# Altium PCB Main_conection.PcbDoc (part 3 of 3)
Units mm, origin at the board's own origin, x right, y up, seen from the top; angles counter-clockwise.
Board outline 75.25 x 97.25 mm, 4 copper layers (Top Layer, Layer 1, Layer 2, Bottom Layer), stack 1.57 mm thick; 186 components, 91 nets, 471 pads, 242 vias.
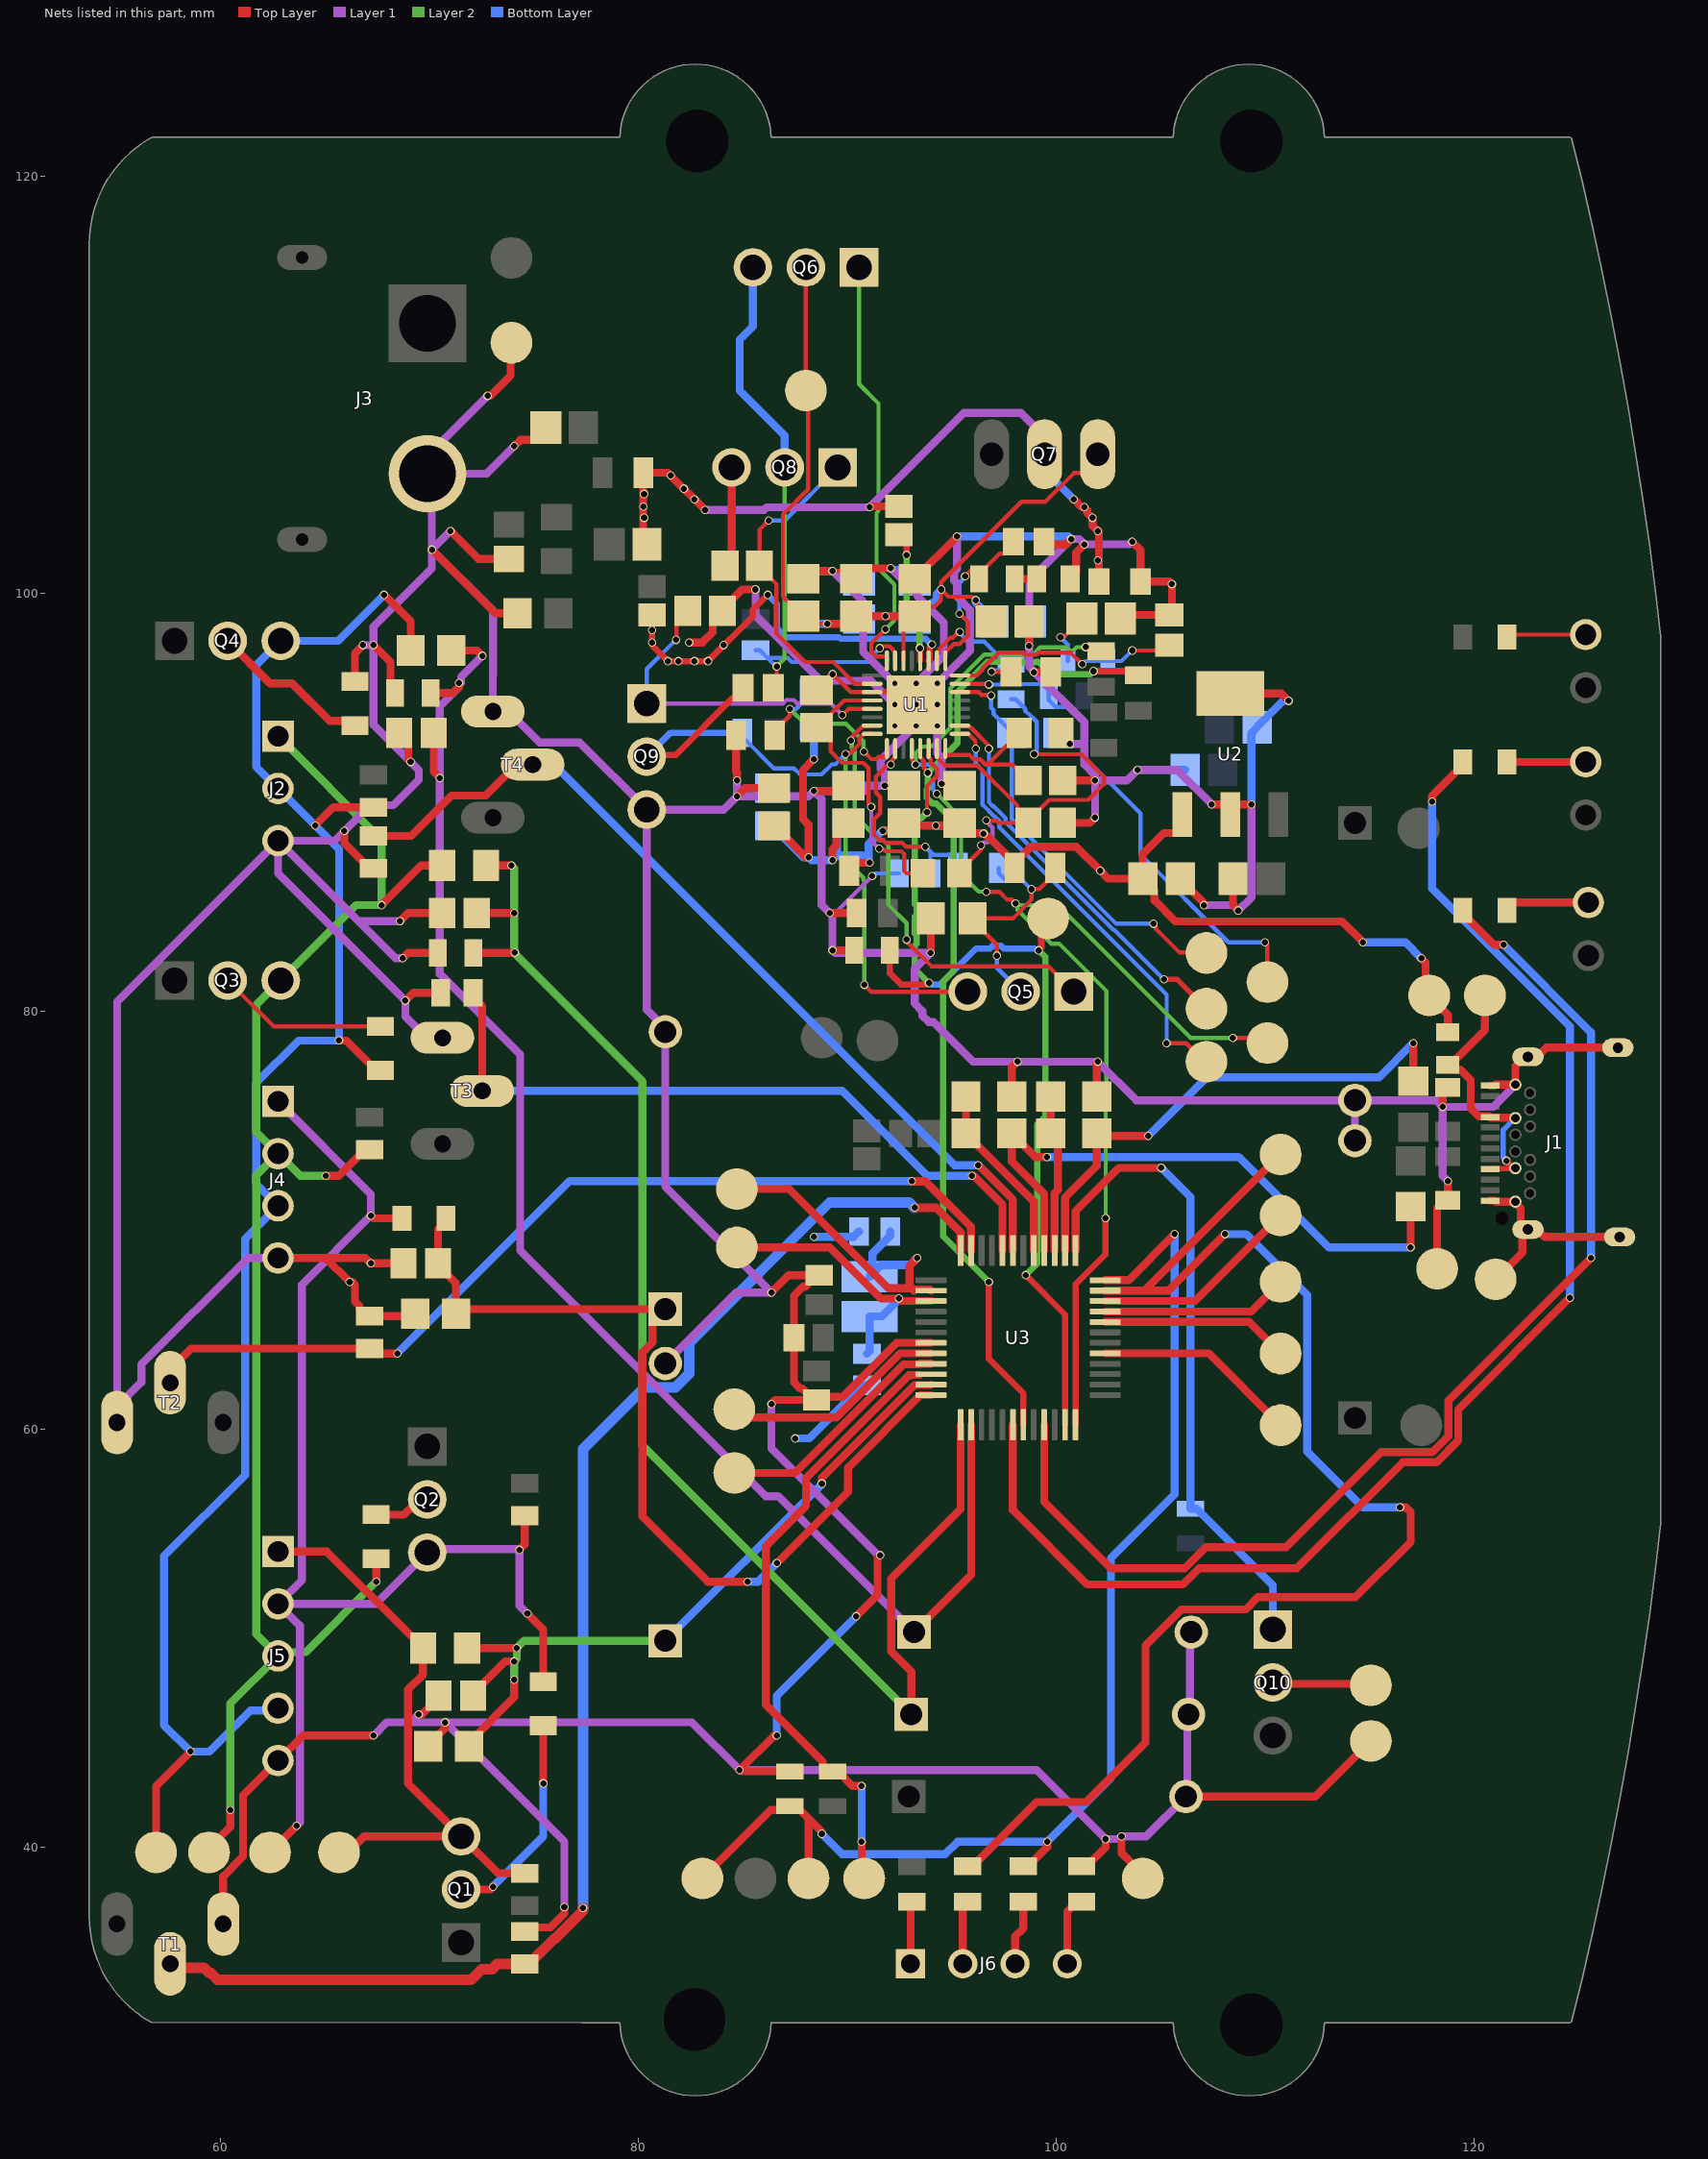
[diagram p4: the nets of this part, all layers, seen from the top]

## Via types
v1: diameter 0.4, hole 0.3, Top Layer to Bottom Layer, 242 vias

## Nets (pads, with @x,y where several pads share a name; then routed paths per layer and width w, separated by ;. In a path a pad name is that pad's centre, name@x,y a point inside that pad or via, vN(x,y) a via of type N, cw(c..) or ccw(c..) an arc to the next point about the centre after c; other vN are vias at no path point) (continued)
CELL_1S: J2.2 J4.3 J5.4 Q4.3 R13.1 R14.2 R39.2 Tp12.1 | length 86.6
  Top Layer w0.381: Tp12.1@56.896,39.751 56.896,42.926 v1(58.547,44.577) ; v1(64.516,88.9) 65.391,89.775 R14.2@67.31,89.775 ; v1(65.659,78.613) 66.004,78.613 67.435,77.182 R13.1@67.635,77.182 ; v1(67.818,99.949) 69.088,98.679 R39.2@69.088,97.282
  Bottom Layer w0.381: J5.4@62.738,46.649 62.624,46.535 61.412,46.535 59.454,44.577 v1(58.547,44.577) 57.277,45.847 57.277,53.93 61.166,57.818 61.166,69.127 J4.3@62.738,70.699 61.692,71.745 61.692,76.574 63.731,78.613 v1(65.659,78.613) 65.659,87.757 v1(64.516,88.9) J2.2@62.738,90.678 61.692,91.724 61.692,96.569 Q4.3@62.865,97.742 65.611,97.742 v1(67.818,99.949)
CELL_1S_ADC: C43.2 D3.1 R39.1 R45.2 U3.14 | length 73.9
  Top Layer w0.381: R45.2@70.037,95.25 71.12,95.25 71.407,95.537 v1(71.407,95.725) ; C43.2@70.187,93.345 70.187,91.484 v1(70.485,91.186) ; R39.1@71.04,97.282 72.263,97.282 v1(72.517,97.028) ; D3.1@93.184,50.292 95.921,53.029 U3.14@95.921,60.219
  Layer 1 w0.381: v1(71.407,95.725) 71.407,95.537 70.485,94.615 v1(70.485,91.186) 70.485,81.795 74.333,77.947 74.333,68.555 86.087,56.801 86.675,56.801 D3.1@93.184,50.292 ; v1@71.501,95.725 71.501,96.012 v1(72.517,97.028)
CELL_1S_DIS_EN: R16.2 T4.2 U3.43 | length 43.1
  Top Layer w0.381: R16.2@67.31,88.406 69.109,88.406 71.038,90.335 72.682,90.335 74.168,91.821 T4.2@74.93,91.821 ; v1(96.266,72.644) 97.921,70.989 U3.43@97.921,68.559
  Bottom Layer w0.381: T4.2@74.93,91.821 75.946,91.821 95.123,72.644 v1(96.266,72.644)
CELL_2S: J2.1 J4.2 J5.3 Q3.3 R10.1 R11.2 R37.2 Tp11.1 | length 77.7
  Top Layer w0.381: Tp11.1@59.436,39.751 59.436,39.941 60.452,40.957 v1(60.452,41.783) ; v1(65.024,72.136) 65.654,72.136 66.91,73.392 R11.2@67.112,73.392 ; v1(67.437,52.705) R10.1@67.437,53.814 ; v1(67.691,85.09) 69.596,86.995 R37.2@70.597,86.995
  Layer 2 w0.381: v1(60.452,41.783) 60.452,46.863 J5.3@62.738,49.149 ; J2.1@62.738,93.178 67.691,88.225 v1(67.691,85.09) 66.469,85.09 Q3.3@62.865,81.486 61.692,80.313 61.692,74.245 J4.2@62.738,73.199 ; v1(65.024,72.136) 63.801,72.136 J4.2@62.738,73.199 ; v1(67.437,52.705) 64.064,49.332 62.921,49.332 J5.3@62.738,49.149 ; J5.3@62.738,49.149 61.692,50.195 61.692,72.153 J4.2@62.738,73.199
CELL_2S_ADC: C40.2 D4.1 R37.1 R41.2 U3.13 | length 69.2
  Top Layer w0.381: R41.2@72.097,82.804 74.06,82.804 v1(74.074,82.818) ; C40.2@72.247,84.709 v1(74.041,84.709) ; R37.1@72.697,86.995 v1(73.914,86.995) ; D4.1@93.057,46.355 93.057,48.406 92.092,49.371 92.092,52.853 95.421,56.182 U3.13@95.421,60.219
  Layer 2 w0.381: v1(73.914,86.995) 74.041,86.868 v1(74.041,84.709) 74.041,82.851 v1(74.074,82.818) ; v1@74.051,82.794 80.188,76.657 80.188,59.224 D4.1@93.057,46.355
CELL_2S_DIS_EN: R12.2 T3.2 U3.44 | length 34.2
  Top Layer w0.381: R12.2@72.076,80.899 72.076,80.697 72.517,80.256 T3.2@72.517,76.2 ; v1(95.965,72.128) 96.052,72.128 97.421,70.76 U3.44@97.421,68.559
  Bottom Layer w0.381: T3.2@72.517,76.2 89.756,76.2 93.828,72.128 v1(95.965,72.128)
CELL_3S: J4.1 J5.2 Q2.3 R6.1 R8.2 R38.2 Tp10.1 | length 63.4
  Top Layer w0.381: Tp10.1@62.357,39.751 v1(63.627,41.021) ; v1(67.183,70.231) 67.31,70.104 R38.2@68.673,70.104 ; v1(74.295,54.229) 74.549,54.483 R8.2@74.549,55.866 ; v1(74.676,51.181) 75.438,50.419 R6.1@75.438,47.913
  Layer 1 w0.381: J4.1@62.738,75.699 67.183,71.254 v1(67.183,70.231) 63.881,66.929 63.881,52.792 J5.2@62.738,51.649 ; v1(63.627,41.021) 63.784,41.178 63.784,50.603 J5.2@62.738,51.649 ; v1(74.676,51.181) 74.295,51.562 v1(74.295,54.229) 74.264,54.26 70.039,54.26 67.428,51.649 J5.2@62.738,51.649
CELL_3S_ADC: C42.2 D5.1 R38.1 R44.2 U3.12 | length 45
  Top Layer w0.381: C42.2@70.4,67.845 71.252,66.993 R44.2@71.252,65.532 71.472,65.752 D5.1@81.28,65.752 80.67,65.142 80.67,64.163 80.188,63.68 80.188,55.829 83.312,52.705 v1(85.217,52.705) ; C42.2@70.4,67.945 70.4,69.581 70.773,69.954 R38.1@70.773,70.104 ; v1(86.614,53.594) 90.03,57.01 90.03,58.172 93.497,61.639 U3.12@94.001,61.639
  Bottom Layer w0.381: v1(85.217,52.705) 85.725,52.705 v1(86.614,53.594)
CELL_3S_DIS_EN: R9.2 T2.2 U3.47 | length 45
  Top Layer w0.381: T2.2@57.572,62.23 57.572,62.856 58.582,63.867 R9.2@67.112,63.867 67.352,63.627 v1(68.453,63.627)
  Top Layer w0.4: v1(93.091,71.882) 93.101,71.872 93.736,71.872 95.921,69.687 U3.47@95.921,68.559
  Bottom Layer w0.381: v1(68.453,63.627) 76.708,71.882 v1(93.091,71.882)
CELL_4S: J5.1 Q1.3 R1.2 R36.2 Tp9.1 | length 29.2
  Top Layer w0.381: J5.1@62.738,54.149 65.07,54.149 69.129,50.09 69.254,50.09 69.689,49.655 69.676,49.642 69.676,48.261 68.961,47.546 68.961,43.053 Q1.3@71.501,40.513 ; Tp9.1@65.659,39.751 66.097,39.751 66.859,40.513 Q1.3@71.501,40.513 ; R1.2@74.549,38.749 73.265,38.749 Q1.3@71.501,40.513
CELL_4S_ADC: C39.2 D6.1 R36.1 R42.2 U3.11 | length 36
  Top Layer w0.381: R36.1@71.789,49.53 v1(74.168,49.53) ; R42.2@71.882,44.831 71.882,45.011 74.041,47.17 v1(74.041,48.006) ; C39.2@72.072,47.244 72.072,47.344 73.623,48.895 v1(74.041,48.895) ; v1(88.773,57.404) 88.773,57.689 93.206,62.122 93.984,62.122 U3.11@94.001,62.139
  Layer 2 w0.381: v1(74.041,48.006) v1(74.041,48.895) 74.168,49.022 v1(74.168,49.53) 74.515,49.877 D6.1@81.28,49.877
  Bottom Layer w0.381: D6.1@81.28,49.877 88.773,57.37 v1(88.773,57.404)
CELL_4S_DIS_EN: R3.2 T1.2 U3.48 | length 68.8
  Top Layer w0.4: v1(93.218,70.612) 93.227,70.603 94.243,70.603 95.421,69.425 U3.48@95.421,68.559
  Top Layer w0.5: T1.2@57.572,34.417 57.77,34.218 59.2,34.218 59.452,33.967 59.531,33.967 59.843,33.655 71.981,33.655 72.487,34.161 72.991,34.161 73.234,34.403 74.751,34.403 75.95,35.602 75.991,35.602 77.343,36.955 v1(77.343,37.084)
  Bottom Layer w0.5: v1(77.343,37.084) 77.343,59.055 80.291,62.003 81.756,62.003 82.43,62.677 82.43,64.142 89.154,70.866 92.964,70.866 v1(93.218,70.612)
CELL_BATPRESZ: R25.1 R26.2 U1.18 | length 7.1
  Top Layer w0.2: U1.18@94.286,96.788 94.286,97.188 94.386,97.288 94.386,97.349 94.934,97.897 95.049,97.897 95.323,98.171 v1(95.377,98.171) ; v1(96.901,96.266) R26.2@97.831,96.266
  Bottom Layer w0.2: v1(95.377,98.171) 95.377,98.117 95.616,97.878 95.616,97.844 95.757,97.702 96.551,97.702 97.606,96.647 R25.1@97.831,96.647 97.506,96.322 96.971,96.322 96.915,96.266 v1(96.901,96.266)
CHRG_OK: R35.1 Tp18.1 U1.4 U3.24 | length 66
  Top Layer w0.2: U1.4@93.086,92.588 93.086,92.046 93.262,91.87 v1(93.262,91.816) ; v1(96.647,85.725) 97.282,85.725 97.656,85.351 97.864,85.351 v1(98.043,85.171) ; v1(101.403,97.446) 101.946,97.446 R35.1@102.149,97.243 ; v1(108.458,78.74) 108.468,78.73 109.865,78.73 Tp18.1@110.109,78.486
  Top Layer w0.3: U3.24@100.921,60.219 100.921,66.939 102.362,68.38 v1(102.362,70.104)
  Layer 2 w0.2: v1(93.262,91.816) 93.262,92.354 93.589,92.681 94.028,92.681 94.927,93.581 94.927,95.461 96.559,97.093 98.494,97.093 98.514,97.073 98.866,97.073 99.225,97.432 100.48,97.432 100.629,97.282 100.814,97.282 100.978,97.446 v1(101.403,97.446) ; v1(94.277,90.424) 95.442,89.259 95.442,86.58 96.287,85.735 96.637,85.735 v1(96.647,85.725) ; v1(98.043,85.171) 98.057,85.171 v1@98.138,85.09 ; v1(102.362,70.104) 102.362,75.524 102.406,75.568 102.406,80.975 100.133,83.249 99.758,83.249 98.142,84.865 98.142,85.086 v1@98.138,85.09 ; v1(108.458,78.74) 106.426,78.74 100.076,85.09 v1@98.138,85.09
  Bottom Layer w0.2: v1(93.262,91.816) 93.267,91.821 94.073,91.821 94.278,91.616 94.278,91.264 94.093,91.078 94.093,90.622 94.277,90.438 v1(94.277,90.424)
CMPIN: R31.2 Tp15.1 U1.14 | length 19.9
  Top Layer w0.2: U1.14@95.386,95.288 96.281,95.288 96.408,95.161 96.843,95.161 v1(96.881,95.123) ; v1(104.648,84.201) 104.648,84.187 104.775,84.06 104.775,83.947 105.888,82.834 107.158,82.834 Tp15.1@107.188,82.804
  Bottom Layer w0.2: v1(96.881,95.123) 96.881,94.537 96.99,94.427 96.99,94.249 97.874,93.365 R31.2@97.874,93.345 97.874,89.197 102.87,84.201 v1(104.648,84.201)
COMP1: C28.2 R28.2 U1.16 | length 11.2
  Top Layer w0.2: U1.16@95.386,96.088 96.186,96.088 96.476,96.378 96.476,96.442 96.725,96.691 96.764,96.691 97.244,97.172 98.418,97.172 98.516,97.073 99.047,97.073 99.146,97.172 100.69,97.172 v1(101.239,96.623) ; v1(103.632,97.282) 105.156,97.282 C28.2@105.41,97.536
  Bottom Layer w0.2: v1(101.239,96.623) 101.253,96.623 101.404,96.774 R28.2@102.464,96.774 103.124,96.774 v1(103.632,97.282)
COMP2: C27.2 R30.2 U1.17 | length 8.1
  Top Layer w0.2: U1.17@94.686,96.788 94.686,97.188 95.095,97.597 95.368,97.597 95.777,98.005 95.777,98.634 v1(95.364,99.047) ; v1(95.631,100.838) R30.2@96.017,101.224 ; R30.2@96.305,100.711 96.305,100.936 97.283,101.914 97.479,101.914 97.954,102.389 C27.2@97.954,102.489
  Bottom Layer w0.2: v1(95.364,99.047) 95.364,100.517 95.631,100.784 v1(95.631,100.838)
EN_OTG: R34.1 U1.5 U3.19 | length 49.1
  Top Layer w0.2: U1.5@93.486,92.588 93.486,92.188 93.586,92.088 93.586,92.054 93.662,91.977 93.662,91.666 93.853,91.475 v1(93.853,91.421)
  Top Layer w0.3: v1(96.774,67.056) 96.774,63.373 98.421,61.726 U3.19@98.421,60.219 ; v1(101.789,96.293) 103.734,96.293 R34.1@103.927,96.1
  Layer 2 w0.3: v1(93.853,91.421) 93.853,90.672 93.802,90.621 93.802,90.227 94.08,89.949 94.255,89.949 95.09,89.114 95.09,81.946 94.581,81.437 94.581,69.249 v1(96.774,67.056) ; v1@93.862,91.431 93.862,91.449 95.279,92.866 95.279,95.315 96.704,96.741 98.349,96.741 98.368,96.721 99.012,96.721 99.031,96.741 99.13,96.741 99.723,96.148 101.644,96.148 v1(101.789,96.293)
F\A\N\_\E\N\: Q10.1 R53.1 U3.37 | length 31.3
  Top Layer w0.381: U3.37@100.921,68.559 100.921,70.441 102.997,72.517 v1(105.029,72.517)
  Bottom Layer w0.381: v1(105.029,72.517) 106.426,71.12 R53.1@106.426,56.199 106.701,56.199 110.363,52.536 Q10.1@110.363,50.419
GND: C1.1 C2.2 C5.1 C6.1 C9.2 C10.2 C11.2 C12.1 C13.1 C14.1 C15.1 C16.1 C17.1 C18.1 C19.1 C20.1 C21.1 C22.1 C23.1 C24.1 C25.1 C26.1 C27.1 C28.1 C29.1 C30.1 C31.1 C32.1 C33.1 C34.1 C35.1 C36.1 C37.1 C38.1 C39.1 C40.1 C41.1 C42.1 C43.1 C44.1 C45.1 C46.1 C47.2 C48.2 D1.2 D2.2 D3.2 D4.2 D5.2 D6.2 D7.2 J1.A1 J1.A12 J1.B1 J1.B12 J1.SH1 J1.SH2 J1.SH3 J1.SH4 J2.3 J3.2 J4.4 J5.5 Q9.3 R3.1 R5.1 R7.1 R9.1 R12.1 R15.1 R16.1 R26.1 R27.1 R29.1 R31.1 R41.1 R42.1 R43.1 R44.1 R45.1 R48.1 R50.1 R51.1 R61.1 T1.1 T2.1 T3.1 T4.1 Tp5.1 Tp6.1 Tp8.1 Tp20.1 Tp35.1 U1.27 U1.GND U1.GND1 U1.P$1 U1.P$2 U1.P$3 U1.P$4 U1.P$5 U1.P$6 U1.P$7 U1.P$8 U1.P$9 U2.2 U2.4 U3.7 | length 584.1
  Top Layer w0.2: v1(89.281,101.092) 90.054,101.092 C33.1@90.424,100.722 ; v1(89.295,96.154) 90.161,95.288 U1.27@91.186,95.288 91.831,95.288 92.247,95.704 U1.P$3@92.27,95.704 ; v1(94.518,90.902) 95.291,90.902 C26.1@95.377,90.816
  Top Layer w0.381: T1.1@60.112,36.322 60.112,38.599 61.065,39.553 61.065,42.476 J5.5@62.738,44.149 63.928,45.339 v1(67.31,45.339) ; J4.4@62.738,68.199 65.024,68.199 ; v1(65.913,88.646) 65.913,88.049 67.108,86.854 R16.1@67.31,86.854 ; R15.1@66.421,95.792 66.421,97.155 v1(66.802,97.536) ; v1(67.31,97.536) 68.119,96.727 68.119,95.469 R45.1@68.337,95.25 ; C43.1@68.537,93.345 68.972,92.91 68.972,92.064 v1(69.088,91.948) ; v1(68.58,84.328) 68.961,84.709 C40.1@70.597,84.709 ; v1(68.707,82.55) 68.961,82.804 R41.1@70.397,82.804 ; C42.1@68.75,67.945 v1(67.183,67.945) 66.929,68.199 65.024,68.199 ; v1(68.834,80.518) 69.215,80.899 R12.1@70.523,80.899 ; R44.1@69.3,65.532 69.187,65.419 R9.1@67.112,65.419 66.91,65.419 66.648,65.682 66.648,65.883 66.421,66.11 66.421,66.929 66.294,67.056 v1(66.167,67.056) 65.024,68.199 ; v1(69.477,46.355) 69.633,46.355 70.422,47.144 C39.1@70.422,47.244 ; R42.1@69.93,44.831 69.93,44.885 70.739,45.693 v1(70.739,45.974) ; v1(70.104,102.108) 73.152,99.06 R43.1@74.208,99.06 ; v1(70.993,102.997) 72.326,101.664 C41.1@73.787,101.664 ; v1(72.771,109.474) 72.898,109.474 73.866,110.442 73.866,111.966 Tp8.1@73.914,112.014 ; v1(74.041,107.061) 74.346,107.366 74.994,107.366 75.554,107.925 C1.1@75.554,107.95 ; R3.1@74.549,35.955 74.745,36.151 75.775,36.151 76.446,36.822 v1(76.446,37.126) ; v1(82.423,97.663) 83.058,97.663 83.55,98.155 83.55,98.727 C6.1@84.01,99.187 ; C6.1@84.01,99.262 84.951,100.203 v1(85.598,100.203) ; C11.2@84.673,93.218 84.673,91.476 84.709,91.44 v1(84.709,91.059) ; v1(84.709,90.297) 85.101,90.689 C20.1@86.487,90.689 ; v1(86.36,61.214) 86.549,61.403 C45.1@88.519,61.403 ; v1(86.36,66.548) 87.187,67.375 C44.1@88.646,67.375 88.521,67.375 87.963,66.817 87.85,66.817 87.438,66.405 C46.1@87.438,64.389 87.438,62.246 87.723,61.961 87.836,61.961 88.394,61.403 C45.1@88.519,61.403 ; v1(86.614,45.339) 86.487,45.339 v1(84.836,43.688) 84.898,43.626 R48.1@87.249,43.626 ; C31.1@87.884,100.722 88.254,101.092 v1(89.281,101.092) ; v1(88.392,90.551) 89.778,90.551 C22.1@90.043,90.816 ; C13.1@88.519,95.388 88.544,95.388 89.295,96.139 v1(89.295,96.154) ; v1(89.154,84.709) C9.2@90.436,84.709 ; v1(89.281,82.931) R29.1@90.336,82.931 ; v1(90.424,51.054) 91.44,52.07 91.44,53.848 v1(91.567,53.975) ; C33.1@90.424,100.722 90.921,101.219 v1(92.075,101.219) ; v1(91.786,90.805) 92.699,90.805 C24.1@92.71,90.816 ; C35.1@93.243,100.722 95.25,102.729 v1(95.25,102.743) ; v1(93.98,82.804) 93.996,82.82 C5.1@93.996,84.455 ; U3.7@94.001,64.139 92.351,64.139 89.765,61.554 88.67,61.554 C45.1@88.519,61.403 ; R51.1@97.874,75.925 97.874,77.333 v1(98.138,77.597) ; v1(98.69,97.498) C38.1@98.69,98.679 ; v1(98.933,96.246) 99.713,96.246 R26.1@99.733,96.266 ; C27.1@99.404,102.489 99.54,102.353 100.448,102.353 v1(100.711,102.616) ; R27.1@100.228,93.345 100.228,93.22 v1(100.641,92.807) ; C12.1@100.307,89.027 101.6,89.027 v1(101.854,89.281) ; C18.1@100.307,91.059 v1(101.854,91.059) ; C29.1@100.663,100.711 100.947,100.996 100.947,101.957 101.346,102.356 v1(101.346,102.362) ; R61.1@101.219,39.077 101.444,39.077 102.362,39.995 v1(102.362,40.386) ; R50.1@101.938,75.925 101.938,77.554 v1(101.981,77.597) ; C30.1@103.074,98.806 103.254,98.986 C28.1@105.41,98.986 105.537,99.113 v1(105.537,100.457) 105.41,100.584 C2.2@104.038,100.584 104.038,102.083 v1(103.632,102.489) ; v1(103.124,40.513) 103.124,39.708 104.14,38.692 Tp20.1@104.14,38.502 ; C14.1@105.94,86.36 105.94,86.335 107.061,85.214 v1(107.061,85.09) ; D7.2@106.206,42.418 112.395,42.418 Tp35.1@115.062,45.085 ; v1(107.442,89.916) 108.046,89.916 U2.2@108.331,89.631 ; U2.2@108.331,89.429 U2.2@108.331,89.631 ; U2.4@108.331,95.229 110.765,95.229 v1(111.125,94.869) ; C15.1@108.458,86.36 108.458,85.09 v1(108.712,84.836) ; v1(109.347,89.916) 108.616,89.916 U2.2@108.331,89.631 ; Tp6.1@118.237,67.691 118.237,70.601 118.595,70.959 R7.1@118.745,70.959 v1(118.745,71.882) ; v1(118.491,75.438) 118.491,76.107 R5.1@118.745,76.361 ; J1.A1@120.772,70.948 120.99,70.948 121.04,70.898 J1.B12@121.982,70.898 121.982,70.841 122.234,70.59 122.234,69.808 J1.SH3@122.474,69.568 ; J1.A12@120.772,76.448 120.99,76.448 121.04,76.498 J1.B1@121.982,76.498 121.982,77.388 122.422,77.828 J1.SH4@122.582,77.828 123.022,77.828 123.464,78.27 J1.SH2@126.89,78.27 ; Tp5.1@121.031,67.183 122.317,68.469 122.317,69.328 122.557,69.568 123.022,69.568 123.382,69.208 J1.SH1@126.972,69.208
  Layer 1 w0.2: v1(89.154,84.709) 89.164,84.719 89.418,84.719 v1(91.186,86.487)
  Layer 1 w0.381: T2.1@55.032,60.325 T2.1@55.032,61.087 ; J4.4@62.738,68.199 61.288,68.199 56.193,63.104 56.193,62.248 T2.1@55.032,61.087 ; v1(66.802,97.536) v1(67.31,97.536) ; v1(67.31,45.339) 67.945,45.974 69.096,45.974 ; v1(68.58,84.328) 66.588,84.328 ; v1(68.707,82.55) 68.366,82.55 66.588,84.328 ; v1(69.477,46.355) 69.096,45.974 ; T3.1@70.612,78.74 69.85,78.74 68.834,79.756 v1(68.834,80.518) 62.738,86.614 J2.3@62.738,88.178 ; v1(70.993,102.997) v1(70.104,102.108) ; v1(72.771,109.474) 69.888,106.591 J3.2@69.888,105.747 ; v1(74.041,107.061) 72.727,105.747 J3.2@69.888,105.747 ; v1(76.446,37.126) 76.446,40.267 v1(70.739,45.974) ; D6.2@81.28,63.153 84.675,66.548 v1(86.36,66.548) 81.28,71.628 D5.2@81.28,79.028 81.28,79.19 80.391,80.079 Q9.3@80.391,89.662 ; v1(84.709,91.059) v1(84.709,90.297) ; v1(85.598,100.203) 85.598,98.966 88.727,95.837 91.121,95.837 U1.P$2@92.27,94.688 ; v1(86.36,61.214) 86.36,59.088 91.473,53.975 v1(91.567,53.975) ; v1(89.281,101.092) 90.754,99.619 90.754,97.22 U1.P$3@92.27,95.704 ; v1@91.777,90.809 91.782,90.814 91.782,91.42 91.589,91.613 91.589,92.019 93.242,93.672 U1.P$9@93.286,93.672 ; v1(91.786,90.805) 91.782,90.801 91.074,90.801 90.824,90.551 v1(88.392,90.551) ; v1(92.075,101.219) 93.347,99.947 93.347,99.889 94.615,98.62 94.615,97.033 U1.P$8@93.286,95.704 ; U1.P$4@94.302,93.672 94.302,92.364 94.518,92.149 v1(94.518,90.902) ; U1.P$5@94.302,95.704 95.867,97.269 95.867,99.237 95.25,99.855 95.25,100.49 95.115,100.624 95.115,101.052 95.25,101.186 v1(95.25,102.743) ; v1(98.69,97.498) 98.69,97.322 98.705,97.308 98.705,96.494 98.933,96.266 v1(98.933,96.246) ; v1@98.705,97.498 98.705,100.61 v1(100.711,102.616) 101.092,102.616 v1(101.346,102.362) 103.505,102.362 v1(103.632,102.489) ; v1@98.943,96.256 101.346,93.853 101.346,93.693 101.338,93.686 101.338,93.258 101.346,93.251 101.346,92.807 ; v1(100.641,92.807) 101.346,92.807 ; v1(101.854,89.281) v1(101.854,91.059) ; D3.2@106.46,50.292 106.397,50.228 106.397,46.419 D4.2@106.333,46.355 106.27,46.291 106.27,42.481 D7.2@106.206,42.418 104.301,40.513 v1(103.124,40.513) 102.997,40.386 v1(102.362,40.386) 99.06,43.688 v1(84.836,43.688) 82.55,45.974 v1(70.739,45.974) ; v1(107.061,85.09) 108.458,85.09 v1(108.712,84.836) 109.347,85.471 v1(109.347,89.916) ; v1(107.442,89.916) 105.791,91.567 v1(103.886,91.567) 103.378,91.059 v1(101.854,91.059) ; D2.2@114.3,73.821 D1.2@114.3,75.751 ; v1(118.745,71.882) 118.491,72.136 v1(118.491,75.438) ; J1.B1@121.982,76.498 120.922,75.438 v1(118.491,75.438) ; T2.1@55.032,61.087 55.032,80.472 J2.3@62.738,88.178 ; J2.3@62.738,88.178 65.445,88.178 v1(65.913,88.646) 67.14,89.873 68.25,89.873 69.477,91.099 69.477,91.559 v1(69.088,91.948) 67.31,93.726 v1(67.31,97.536) ; J2.3@62.738,88.178 66.588,84.328 ; v1(67.31,97.536) 67.31,98.425 70.104,101.219 v1(70.104,102.108) ; 69.096,45.974 v1(70.739,45.974) ; J3.2@69.888,105.747 70.104,105.531 v1(70.104,102.108) ; v1(70.104,102.108) 73.033,99.179 73.033,96.069 73.025,96.062 T4.1@73.025,94.361 73.787,94.361 75.273,92.875 77.178,92.875 Q9.3@80.391,89.662 ; Q9.3@80.391,89.662 84.074,89.662 v1(84.709,90.297) ; v1(84.709,90.297) 88.138,90.297 v1(88.392,90.551) ; v1(88.392,90.551) 88.765,90.178 88.765,85.098 v1(89.154,84.709) 89.281,84.582 v1(89.281,82.931) 89.408,82.804 v1(93.98,82.804) 93.218,82.042 93.218,80.391 93.591,80.018 93.591,79.796 93.893,79.494 94.115,79.494 96.012,77.597 v1(98.138,77.597) v1(101.981,77.597) 103.827,75.751 D1.2@114.3,75.751 ; 101.346,92.807 101.346,91.821 101.854,91.313 v1(101.854,91.059) ; D1.2@114.3,75.751 118.178,75.751 v1(118.491,75.438)
  Bottom Layer w0.2: v1(89.281,101.092) 90.054,101.092 C34.1@90.551,100.595 ; v1(91.186,86.487) 91.313,86.614 C10.2@92.468,86.614 ; v1(92.075,101.219) 92.594,101.219 C36.1@93.218,100.595 ; v1(94.518,90.902) 95.291,90.902 C25.1@95.377,90.816
  Bottom Layer w0.381: v1(84.709,90.297) 85.101,90.689 C19.1@86.36,90.689 ; v1(86.614,45.339) 86.614,47.244 v1(90.424,51.054) ; v1(87.503,59.563) 88.18,59.563 90.732,62.115 C48.2@90.932,62.115 ; C32.1@87.884,100.722 88.254,101.092 v1(89.281,101.092) ; v1(88.392,69.215) 90.297,69.215 C47.2@90.551,69.469 ; C21.1@90.043,90.816 91.775,90.816 v1(91.786,90.805) 92.699,90.805 C23.1@92.71,90.816 ; v1(95.25,102.743) 100.584,102.743 v1(100.711,102.616) ; v1(98.69,97.498) 98.69,98.552 C37.1@98.817,98.679 ; v1(103.886,91.567) C16.1@106.172,91.567 ; v1(109.347,89.916) 109.347,93.334 C17.1@109.612,93.599 ; C17.1@109.612,93.624 110.857,94.869 v1(111.125,94.869)
Green_LED: R56.1 U3.18 | length 67.8
  Top Layer w0.381: U3.18@97.921,60.219 97.921,56.13 101.473,52.578 106.061,52.578 106.823,53.34 111.506,53.34 116.589,58.423 118.21,58.423 119.25,59.463 119.25,60.957 v1(124.587,66.294) ; v1(117.991,90.043) 117.991,90.316 119.473,91.798 R56.1@119.473,91.948
  Bottom Layer w0.381: v1(117.991,90.043) 117.991,85.892 124.587,79.295 124.587,70.277 124.589,70.275 124.589,68.861 124.587,68.859 v1(124.587,66.294)
HIDRV1: Q5.1 U1.31 | length 21.2
  Top Layer w0.2: v1(90.17,92.964) 90.208,93.002 90.208,93.135 90.663,93.59 90.688,93.59 90.786,93.688 U1.31@91.186,93.688 ; v1(92.837,83.439) 92.847,83.429 92.847,83.336 94.014,82.169 99.619,82.169 Q5.1@100.838,80.95
  Layer 2 w0.2: v1(90.17,92.964) 90.208,92.926 90.208,92.602 90.349,92.462 90.349,89.39 91.525,88.214 91.702,88.214 91.951,87.965 91.951,85.121 92.837,84.235 v1(92.837,83.439)
HIDRV2: Q6.1 U1.24 | length 20.7
  Top Layer w0.2: v1(91.821,98.295) 91.818,98.295 91.144,97.621 91.144,97.229 91.378,96.995 91.886,96.995 U1.24@91.886,96.788
  Layer 2 w0.2: Q6.1@90.551,115.621 90.551,110.036 91.484,109.103 91.484,103.964 91.396,103.876 91.396,101.297 92.246,100.447 92.246,98.72 v1(91.821,98.295)
IADPT: C18.2 R27.2 U1.8 | length 7
  Top Layer w0.2: U1.8@94.686,92.588 94.686,92.288 95.833,92.288 96.052,92.069 96.36,92.069 96.609,91.821 96.704,91.821 ; R27.2@98.228,93.345 98.228,93.22 97.728,92.72 97.603,92.72 96.704,91.821 ; C18.2@98.657,91.059 98.657,91.109 98.082,91.684 98.032,91.684 97.895,91.821 96.704,91.821
ILIM_HIZ: R29.2 Tp14.1 U1.6 U3.23 | length 47.4
  Top Layer w0.2: v1(93.81,89.535) 93.81,90.796 94.278,91.264 94.278,91.616 93.984,91.91 93.984,92.079 93.886,92.178 U1.6@93.886,92.588
  Top Layer w0.3: R29.2@92.036,82.931 92.036,81.827 92.568,81.295 93.831,81.295 v1(93.905,81.368) ; v1(98.533,67.381) 100.421,65.493 U3.23@100.421,60.219 ; v1(99.154,82.931) 99.284,83.061 99.284,84.13 Tp14.1@99.609,84.455
  Layer 2 w0.3: v1(93.81,89.535) 93.218,88.943 93.218,85.127 93.312,85.033 93.312,84.639 93.218,84.545 93.218,83.73 93.312,83.636 93.312,83.242 93.218,83.148 93.218,82.042 93.892,81.368 v1(93.905,81.368) ; v1(98.533,67.381) 99.081,67.929 99.081,74.594 99.475,74.988 99.475,82.61 v1(99.154,82.931)
  Bottom Layer w0.3: v1(93.905,81.368) 93.98,81.368 94.068,81.28 94.424,81.28 96.158,83.014 96.82,83.014 96.958,83.152 97.352,83.152 97.49,83.014 98.977,83.014 99.06,82.931 v1(99.154,82.931)
LODRV1: C6.2 Q9.1 U1.29 | length 16.5
  Top Layer w0.2: v1(81.788,97.79) 81.81,97.812 81.81,98.637 C6.2@82.36,99.187 ; v1(89.754,94.195) 89.767,94.195 90.06,94.488 U1.29@91.186,94.488
  Layer 1 w0.2: Q9.1@80.391,94.742 86.902,94.742 87.073,94.913 87.425,94.913 87.596,94.742 89.207,94.742 v1(89.754,94.195)
  Bottom Layer w0.2: Q9.1@80.391,94.742 80.391,96.393 v1(81.788,97.79)
LODRV2: C7.1 Q8.1 U1.26 | length 15.9
  Top Layer w0.2: v1(86.233,103.505) 85.788,103.06 85.788,101.271 86.606,100.453 86.606,98.086 87.962,96.73 89.32,96.73 90.362,95.688 U1.26@91.186,95.688
  Bottom Layer w0.2: v1(86.233,103.505) 86.995,103.505 Q8.1@89.535,106.045
NetC2_1: C2.1 C8.2 Q7.D R18.2 R22.2 | length 35.3
  Top Layer w0.381: C8.2@80.402,102.362 80.223,102.541 80.223,103.632 v1(80.223,104.166) 80.223,104.775 R18.2@80.223,105.791 81.402,105.791 81.529,105.664 v1(81.534,105.664) v1(83.185,104.013) ; v1(91.059,104.14) 91.1,104.181 R22.2@92.456,104.181 ; v1(100.838,104.521) 100.843,104.521 101.221,104.144 101.342,104.144 v1(101.346,104.14) 101.346,104.135 101.477,104.004 101.477,103.888 101.727,103.637 v1(101.727,103.632) 101.731,103.628 101.731,103.253 101.986,102.997 v1@101.99,102.997 ; C2.1@102.038,100.584 102.038,101.6 v1@102.038,102.997
  Layer 1 w0.381: v1(83.185,104.013) 86.012,104.013 86.139,104.14 v1(91.059,104.14) 95.567,108.648 98.311,108.648 99.441,107.518 Q7.D@99.441,106.68
  Bottom Layer w0.381: Q7.D@99.441,106.68 99.441,105.913 100.833,104.521 v1(100.838,104.521)
  other v1: 101.981,101.6 101.981,102.997 80.264,103.632 82.677,104.521 80.264,104.775 82.169,105.029
NetC5_2: C5.2 Q5.2 R17.1 R20.2 | length 12
  Top Layer w0.2: v1(97.155,82.677) 97.155,83.196 95.996,84.355 C5.2@95.996,84.455 97.928,84.455 98.407,84.935 98.407,84.953 98.806,85.351 v1(98.806,85.852) 98.816,85.862 99.193,85.862 99.949,86.618 R17.1@99.949,86.868
  Bottom Layer w0.2: v1(97.155,82.677) 97.155,82.093 Q5.2@98.298,80.95 ; R20.2@97.241,86.868 97.241,86.618 97.616,86.243 98.415,86.243 v1(98.806,85.852)
NetC7_2: C7.2 Q8.3 | length 4.8
  Top Layer w0.381: C7.2@84.138,101.346 84.455,101.663 Q8.3@84.455,106.045
NetC10_1: C10.1 R20.1 U1.2 | length 10.7
  Top Layer w0.2: v1(92.08,91.816) 92.07,91.825 v1@92.07,91.948 ; U1.2@92.286,92.588 92.286,92.188 92.186,92.088 92.186,92.064 v1@92.07,91.948 ; v1(93.726,87.884) 92.803,87.884 92.622,88.064 91.851,88.064 91.7,88.216 91.523,88.216 91.269,88.47 91.269,89.196 91.567,89.494 91.567,90.282 91.361,90.488 91.361,91.238 v1@92.07,91.948
  Bottom Layer w0.2: v1(93.726,87.884) 94.117,87.493 94.916,87.493 95.291,87.118 R20.1@95.291,86.868 ; C10.1@93.968,86.614 93.968,87.628
NetC11_1: C11.1 R23.1 U1.1 | length 9.5
  Top Layer w0.2: C11.1@86.523,93.218 86.523,93.443 87.249,94.169 v1(87.249,94.488) ; v1(90.782,92.445) 91.141,92.086 91.384,92.086 91.486,92.188 91.886,92.188 U1.1@91.886,92.588
  Layer 2 w0.2: v1(87.249,94.488) 87.967,93.77 89.93,93.77 90.755,92.945 90.755,92.472 v1(90.782,92.445)
  Bottom Layer w0.2: v1(87.249,94.488) 87.263,94.488 87.286,94.465 87.517,94.465 87.811,94.758 87.811,94.862 88.288,95.34 R23.1@88.392,95.34
NetC29_2: C29.2 R30.1 | length 1.1
  Top Layer w0.381: R30.1@98.005,100.711 C29.2@99.063,100.711
NetC30_2: C30.2 R28.1 | length 2.7
  Top Layer w0.2: v1(100.203,97.917) 100.213,97.927 100.37,97.927 101.224,98.781 C30.2@101.224,98.806
  Bottom Layer w0.2: v1(100.203,97.917) 100.564,97.556 R28.1@100.564,96.774
NetD8_2: D8.2 R55.2 | length 4.1
  Top Layer w0.381: R55.2@121.573,84.836 121.573,84.957 121.833,85.217 D8.2@125.476,85.217
NetD9_2: D9.2 R56.2 | length 3.8
  Top Layer w0.381: R56.2@121.573,91.948 D9.2@125.349,91.948
NetD10_2: D10.2 R57.2 | length 3.8
  Top Layer w0.2: R57.2@121.573,97.917 121.7,98.044 D10.2@125.349,98.044
NetF1_2: F1.2 J1.A4 J1.A9 J1.B4 J1.B9 Tp3.1 | length 13.2
  Top Layer w0.254: J1.A4@120.772,72.448 120.794,72.47 J1.B9@121.798,72.47 ; v1(121.547,72.856) 121.667,72.736 121.667,72.628 121.798,72.498 J1.B9@121.982,72.498
  Top Layer w0.381: Tp3.1@120.523,80.772 120.523,79.11 118.87,77.457 F1.2@118.745,77.457 118.98,77.222 119.347,77.222 119.842,76.727 119.842,75.366 120.218,74.989 120.731,74.989 J1.A9@120.772,74.948 120.797,74.923 121.957,74.923 J1.B4@121.982,74.898
  Bottom Layer w0.254: v1(121.547,72.856) 121.405,72.998 121.405,74.337 121.966,74.898 J1.B4@121.982,74.898
NetJ6_1: J6.1 R58.1 | length 3
  Top Layer w0.381: J6.1@93.024,34.417 93.024,37.31 R58.1@93.091,37.377
NetJ6_2: J6.2 R59.1 | length 3.1
  Top Layer w0.381: J6.2@95.524,34.417 95.524,37.143 R59.1@95.758,37.377
NetJ6_3: J6.3 R60.1 | length 3.1
  Top Layer w0.381: J6.3@98.024,34.417 98.024,35.717 98.425,36.118 R60.1@98.425,37.377
NetJ6_4: J6.4 R61.2 | length 3.4
  Top Layer w0.381: J6.4@100.524,34.417 100.524,36.907 100.994,37.377 R61.2@101.219,37.377
NetQ1_2: Q1.2 R6.2 | length 10.3
  Top Layer w0.381: Q1.2@71.501,37.973 72.898,37.973 v1(73.025,38.1) ; v1(75.438,43.053) R6.2@75.438,45.813
  Bottom Layer w0.381: v1(73.025,38.1) 75.438,40.513 v1(75.438,43.053)
NetQ2_2: Q2.2 R10.2 | length 2.7
  Top Layer w0.381: R10.2@67.437,55.914 68.757,55.914 69.485,56.642 Q2.2@69.881,56.642
NetQ3_2: Q3.2 R13.2 | length 8.2
  Top Layer w0.2: Q3.2@60.325,81.486 62.529,79.282 R13.2@67.635,79.282
NetQ4_2: Q4.2 R15.2 | length 7.8
  Top Layer w0.381: Q4.2@60.325,97.742 62.36,95.707 63.411,95.707 65.199,93.918 66.195,93.918 R15.2@66.421,93.692
NetQ10_2: Q10.2 Tp34.1 | length 4.8
  Top Layer w0.381: Q10.2@110.363,47.879 110.426,47.816 114.998,47.816 Tp34.1@115.062,47.752
NetR33_1: R33.1 Tp19.1 U1.15 | length 24.1
  Top Layer w0.2: U1.15@95.386,95.688 96.738,95.688 v1(96.775,95.651) ; v1(109.982,83.312) 109.982,83.298 110.109,83.171 Tp19.1@110.109,81.407
  Bottom Layer w0.2: v1(96.775,95.651) 97.302,95.651 97.375,95.724 97.426,95.673 99.321,95.673 99.646,95.348 R33.1@99.646,95.123 99.646,94.898 99.971,94.573 100.538,94.573 100.838,94.273 100.849,94.273 101.429,93.693 101.429,92.085 104.037,89.477 104.037,87.513 108.238,83.312 v1(109.982,83.312)
NetTp16_1: Tp16.1 U1.10 | length 19.1
  Top Layer w0.2: U1.10@95.386,93.688 95.786,93.688 95.886,93.588 95.91,93.588 96.736,92.763 96.736,92.621 v1(96.774,92.583)
  Top Layer w0.26: v1(105.156,81.534) 105.791,81.534 Tp16.1@107.188,80.137
  Bottom Layer w0.2: v1(96.774,92.583) 96.774,90.017 96.969,89.822 97.005,89.822 97.574,89.252 97.574,89.073 102.746,83.901 102.789,83.901 v1(105.156,81.534)
NetTp17_1: Tp17.1 U1.9 | length 21.4
  Top Layer w0.2: U1.9@95.386,93.288 95.786,93.288 96.129,92.945 96.129,92.593 v1(96.139,92.583) ; v1(105.283,78.486) 106.219,78.486 107.108,77.597 Tp17.1@107.188,77.597
  Bottom Layer w0.2: v1(96.139,92.583) 96.139,91.864 96.472,91.531 96.472,89.894 97.042,89.325 97.077,89.325 97.274,89.128 97.274,88.815 105.283,80.806 v1(105.283,78.486)
OSC32_IN: C47.1 Tp31.1 U3.2 Y1.2 | length 18.3
  Top Layer w0.381: Tp31.1@84.709,71.501 87.217,71.501 91.968,66.75 93.063,66.75 93.174,66.639 ; v1(93.345,68.199) 93.345,68.194 92.966,67.814 92.966,66.903 93.174,66.694 93.946,66.694 U3.2@94.001,66.639
  Bottom Layer w0.4: C47.1@92.051,69.469 92.051,69.269 91.203,68.421 91.203,67.449 Y1.2@91.059,67.305 91.619,67.865 93.005,67.865 93.34,68.199 v1(93.345,68.199)
OSC32_OUT: C48.1 Tp30.1 U3.3 Y1.1 | length 14
  Top Layer w0.381: Tp30.1@84.709,68.707 89.154,68.707 91.598,66.263 v1@92.466,66.263 ; v1(92.462,66.26) 92.467,66.26 92.588,66.139 U3.3@94.001,66.139
  Bottom Layer w0.381: C48.1@90.932,63.615 91.059,63.742 Y1.1@91.059,65.405 91.659,65.405 92.459,66.205 92.459,66.256 v1(92.462,66.26)
OSC_IN: Tp33.1 U3.8 | length 10.9
  Top Layer w0.381: Tp33.1@84.582,60.96 85.02,60.96 85.419,60.561 89.455,60.561 92.533,63.639 U3.8@94.001,63.639
OSC_OUT: Tp32.1 U3.9 | length 11.6
  Top Layer w0.381: Tp32.1@84.582,57.912 87.489,57.912 92.685,63.108 93.447,63.108 93.478,63.139 U3.9@94.001,63.139
Red_LED: R55.1 U3.21 | length 57.8
  Top Layer w0.381: U3.21@99.421,60.219 99.421,56.535 102.616,53.34 106.141,53.34 107.157,54.356 110.998,54.356 115.548,58.906 118.01,58.906 118.767,59.663 118.767,61.363 v1(125.603,68.199) ; R55.1@119.473,84.836 119.473,84.686 120.967,83.192 v1(121.419,83.192)
  Bottom Layer w0.381: v1(121.419,83.192) 125.603,79.009 v1(125.603,68.199)
REGN: C13.2 R24.1 U1.28 | length 13.9
  Top Layer w0.2: C13.2@88.519,93.588 C13.2@88.544,93.588 ; v1(91.142,89.797) 91.142,89.81 91.02,89.932 91.02,91.65 90.765,91.904 89.74,91.904 89.194,92.45 89.194,92.938 C13.2@88.544,93.588 ; U1.28@91.186,94.888 89.844,94.888 C13.2@88.544,93.588 ; v1(91.526,87.789) 91.535,87.78 91.71,87.78 91.822,87.668 92.593,87.668 92.711,87.55 92.711,86.731 92.828,86.614 R24.1@93.612,86.614
  Layer 1 w0.2: v1(91.142,89.797) 91.142,88.173 v1(91.526,87.789)
RESET: R46.1 Tp23.1 U3.10 | length 30
  Top Layer w0.381: v1(90.678,40.259) 90.678,38.629 Tp23.1@90.805,38.502 ; v1(90.678,42.926) 90.255,42.926 89.556,43.626 R46.1@89.281,43.626 89.006,43.626 88.817,43.815 88.817,44.089 86.098,46.808 86.098,54.419 88.011,56.331 88.011,57.658 92.942,62.589 93.082,62.589 93.097,62.604 U3.10@93.447,62.604
  Bottom Layer w0.381: v1(90.678,40.259) v1(90.678,42.926)
SRN: R21.1 U1.19 | length 19.2
  Top Layer w0.3: R21.1@80.645,98.977 v1(80.645,97.663) 80.664,97.644 80.664,97.517 v1(81.407,96.774) v1(81.915,96.774) v1(82.677,96.774) v1(83.326,96.774) 85.472,98.921 85.472,99.24 v1(86.181,99.949) ; U1.19@93.886,96.788 93.936,96.838 93.936,97.438 94.043,97.545 v1(94.043,97.572)
  Bottom Layer w0.3: v1(86.181,99.949) 86.632,99.498 86.632,98.346 87.06,97.917 89.6,97.917 89.672,97.845 93.743,97.845 94.016,97.572 v1(94.043,97.572)
  other v1: 84.074,97.536 80.645,98.257
SRP: R22.1 U1.20 | length 6.5
  Top Layer w0.3: R22.1@92.456,102.829 92.837,102.448 v1(92.837,101.854) ; v1(93.468,97.395) 93.477,97.386 93.477,96.797 U1.20@93.486,96.788
  Layer 2 w0.3: v1(92.837,101.854) 92.837,98.933 93.45,98.32 93.45,97.413 v1(93.468,97.395)
SW1: C3.1 L1.1 Q5.3 Q9.2 U1.32 | length 35.8
  Top Layer w0.2: v1(89.916,92.329) 89.954,92.367 90.139,92.367 90.57,92.798 90.57,93.072 90.786,93.288 U1.32@91.186,93.288 ; v1(90.805,81.28) 91.142,80.943 95.751,80.943 Q5.3@95.758,80.95
  Top Layer w0.3: Q9.2@80.391,92.202 80.46,92.271 81.766,92.271 84.495,95 84.646,95 84.999,95.353 L1.1@84.999,95.504
  Layer 2 w0.2: v1(89.916,92.329) 89.916,87.249 90.761,86.404 90.761,86.311 90.805,86.267 v1(90.805,81.28)
  Bottom Layer w0.2: C3.1@84.975,93.345 84.975,93.145 86.479,91.641 87.44,91.641 87.732,91.348 88.765,91.348 89.251,91.834 89.421,91.834 v1(89.916,92.329)
  Bottom Layer w0.3: Q9.2@80.391,92.202 81.534,93.345 C3.1@84.975,93.345
SW2: C4.1 L1.2 Q6.3 Q8.2 U1.23 | length 30
  Top Layer w0.2: L1.2@86.451,95.504 86.614,95.667 v1(86.614,96.52) ; v1(91.544,97.395) 91.598,97.395 91.691,97.488 92.01,97.488 92.186,97.312 92.186,97.288 92.286,97.188 U1.23@92.286,96.788
  Layer 2 w0.2: v1(86.614,96.52) 86.995,96.901 Q8.2@86.995,106.045
  Bottom Layer w0.2: C4.1@85.598,97.294 85.798,97.294 C4.1@86.173,96.919 ; v1(86.614,96.52) 86.604,96.53 86.562,96.53 C4.1@86.173,96.919 ; v1(91.544,97.395) 91.188,97.039 91.188,96.903 91.015,96.73 87.338,96.73 87.149,96.919 C4.1@86.173,96.919
  Bottom Layer w0.381: Q6.3@85.471,115.621 85.471,112.793 84.836,112.158 84.836,109.728 86.995,107.569 Q8.2@86.995,106.045
SWCLK/BOOT0: R48.2 R60.2 Tp25.1 Tp29.1 U3.36 | length 59.7
  Top Layer w0.381: Tp29.1@83.058,38.502 86.339,41.783 87.06,41.783 R48.2@87.249,41.972 87.524,41.972 88.773,40.723 v1(88.773,40.64) ; Tp25.1@88.138,38.502 88.138,41.358 ; R60.2@98.425,39.077 98.65,39.077 99.568,39.995 v1(99.568,40.259) ; U3.36@102.341,67.139 103.461,67.139 v1(105.664,69.342)
  Bottom Layer w0.381: v1(88.773,40.64) 89.745,39.668 94.683,39.668 95.274,40.259 v1(99.568,40.259) 102.616,43.307 102.616,53.835 105.664,56.883 v1(105.664,69.342)
SWDIO: R59.2 Tp28.1 U3.35 | length 66.7
  Top Layer w0.381: R59.2@95.758,39.077 95.983,39.077 99.061,42.155 101.431,42.155 104.275,44.998 104.275,49.651 106.008,51.384 109.07,51.384 109.654,51.968 114.325,51.968 116.967,54.61 116.967,56.038 116.744,56.261 v1(116.459,56.261) ; U3.35@102.341,66.639 104.231,66.639 ; v1(108.077,69.342) 105.374,66.639 104.231,66.639 ; Tp28.1@110.744,73.152 104.231,66.639
  Bottom Layer w0.381: v1(108.077,69.342) 109.093,69.342 112.014,66.421 112.014,58.928 114.681,56.261 v1(116.459,56.261)
UCPD2_CC1: R2.1 R47.2 U3.38 | length 25.1
  Top Layer w0.381: U3.38@100.421,68.559 100.421,71.084 101.938,72.601 R47.2@101.938,74.168 102.065,74.041 v1(104.394,74.041) ; R2.1@117.094,76.665 v1(117.094,78.486)
  Bottom Layer w0.381: v1(104.394,74.041) 107.196,76.843 115.451,76.843 v1(117.094,78.486)
UCPD2_CC2: R4.1 R49.2 U3.40 | length 29.6
  Top Layer w0.381: R49.2@97.874,74.148 98.997,73.025 v1(99.556,73.025) ; R49.2@97.874,74.168 97.874,72.814 99.421,71.267 U3.40@99.421,68.559 ; v1(116.967,68.707) R4.1@116.967,70.655
  Bottom Layer w0.381: v1(99.556,73.025) 99.563,73.033 108.728,73.033 113.054,68.707 v1(116.967,68.707)
UCPD2_DBCC1: R47.1 R50.2 U3.39 | length 7.6
  Top Layer w0.381: R50.2@99.738,75.925 R47.1@99.738,74.168 100.071,73.835 100.071,71.451 99.921,71.301 U3.39@99.921,68.559
UCPD2_DBCC2: R49.1 R51.2 U3.41 | length 8.7
  Top Layer w0.381: R49.1@95.674,74.148 98.921,70.901 U3.41@98.921,68.559 ; R49.1@95.674,74.168 R51.2@95.674,75.925
USART1_CTS: Tp24.1 U3.33 | length 9
  Top Layer w0.381: U3.33@102.341,65.639 109.327,65.639 Tp24.1@110.744,67.056
USART1_RTS: Tp26.1 U3.34 | length 10.1
  Top Layer w0.381: U3.34@102.341,66.139 106.652,66.139 Tp26.1@110.744,70.231
USART1_RX: Tp22.1 U3.32 | length 9
  Top Layer w0.381: U3.32@102.341,65.139 109.232,65.139 Tp22.1@110.744,63.627
USART1_TX: Tp21.1 U3.29 | length 9.8
  Top Layer w0.381: U3.29@102.341,63.639 107.303,63.639 Tp21.1@110.744,60.198
VBUS: C14.2 C19.2 C20.2 C21.2 C22.2 C23.2 C24.2 C25.2 C26.2 F1.1 R17.2 R19.2 R23.2 Tp4.1 U2.1 | length 61.8
  Top Layer w0.381: C20.2@86.487,88.889 86.512,88.889 88.025,87.376 v1(88.138,87.376) 88.138,88.94 87.876,89.201 87.876,91.559 v1(88.392,92.075) ; v1(89.281,87.249) 89.281,87.761 89.459,87.938 89.459,88.457 90.018,89.016 C22.2@90.043,89.016 ; R19.2@90.084,86.741 90.084,86.837 90.369,87.122 v1(91.059,87.122) ; v1(91.694,88.646) 92.315,88.646 92.685,89.016 92.801,88.9 v1(94.234,88.9) 95.261,88.9 C26.2@95.377,89.016 95.867,88.527 96.512,88.527 96.516,88.523 v1(96.52,88.519) ; v1@96.52,88.527 96.545,88.527 96.687,88.384 96.733,88.384 R17.2@97.999,87.118 ; R17.2@97.999,86.868 R17.2@97.999,87.118 ; U2.1@106.031,89.429 106.031,88.829 105.746,88.544 105.146,88.544 104.14,87.538 C14.2@104.14,86.36 ; v1(114.681,83.312) 113.68,84.313 105.7,84.313 104.7,85.313 104.7,85.8 C14.2@104.14,86.36 ; v1(117.475,82.55) 117.681,82.344 117.681,80.905 118.745,79.841 F1.1@118.745,79.007 ; R17.2@97.999,87.118 98.766,87.885 100.964,87.885 v1(102.108,86.741) 102.489,86.36 C14.2@104.14,86.36
  Bottom Layer w0.381: C19.2@86.36,88.889 86.385,88.889 87.898,87.376 v1(88.138,87.376) 88.265,87.249 v1(89.281,87.249) 89.504,87.472 ; v1(88.392,92.075) R23.2@88.392,93.588 ; C21.2@90.043,89.016 89.504,88.477 89.504,87.472 ; C23.2@92.685,89.016 92.315,88.646 91.653,88.646 91.01,88.003 91.01,87.171 v1(91.059,87.122) 90.709,87.472 89.504,87.472 ; v1(94.234,88.9) 95.261,88.9 C25.2@95.377,89.016 ; v1(114.681,83.312) 116.713,83.312 v1(117.475,82.55)
VDDA: C12.2 R24.2 R25.2 U1.7 | length 23.6
  Top Layer w0.2: U1.7@94.286,92.588 94.286,92.188 94.384,92.09 94.384,92.063 94.68,91.768 96.236,91.768 98.132,89.871 98.132,89.552 C12.2@98.657,89.027 97.247,89.027 97.147,89.127 96.674,89.127 v1(96.647,89.154) ; R24.2@95.364,86.614 95.364,86.718 96.393,87.747 v1(96.393,87.961) ; C12.2@98.657,89.127 99.662,90.132 101.528,90.132 102.279,90.883 102.279,91.235 101.2,92.314 v1(98.938,92.314)
  Layer 1 w0.2: v1(96.393,87.961) 96.407,87.961 96.539,88.094 96.696,88.094 96.945,88.343 96.945,88.802 96.647,89.1 v1(96.647,89.154)
  Bottom Layer w0.2: R25.2@97.831,94.947 98.056,94.947 98.513,94.49 98.513,94.389 98.636,94.267 98.658,94.267 99.06,93.864 99.06,92.446 98.938,92.324 v1(98.938,92.314)
VSYS: C31.2 C32.2 C33.2 C34.2 C35.2 C36.2 C37.2 C38.2 Q6.2 Q7.S Tp13.1 U1.22 | length 47.5
  Top Layer w0.2: Q6.2@88.011,115.621 Tp13.1@88.011,109.728 88.122,109.617 88.122,105 86.907,103.785 86.907,99.874 87.859,98.922 C31.2@87.884,98.922 88.254,98.552 v1(89.027,98.552) ; U1.22@92.686,96.788 92.686,98.365 C35.2@93.23,98.91 ; C35.2@93.218,98.922 93.679,99.383 94.176,99.383 94.478,99.685 94.478,100.193 v1(94.488,100.203) ; C38.2@96.89,98.679 96.24,99.329 96.24,99.58 96.139,99.681 v1(96.139,99.695) 96.125,99.695 95.961,99.859 94.832,99.859 v1(94.488,100.203) ; Q7.S@101.981,106.68 101.981,106.455 101.299,105.773 100.843,105.773 99.473,104.403 98.333,104.403 94.488,100.558 v1(94.488,100.203)
  Top Layer w0.381: v1(89.027,98.552) 90.054,98.552 C33.2@90.424,98.922 91.81,98.922 v1(91.821,98.933) 91.832,98.922 C35.2@93.218,98.922
  Bottom Layer w0.2: C32.2@87.884,98.922 C32.2@87.909,98.922
  Bottom Layer w0.381: C32.2@87.909,98.922 88.279,98.552 v1(89.027,98.552) ; C34.2@90.551,98.795 90.689,98.933 v1(91.821,98.933) ; C36.2@93.218,98.795 93.243,98.795 94.002,99.554 94.113,99.554 94.285,99.726 94.285,100 v1(94.488,100.203) ; v1(96.139,99.695) 96.139,99.582 97.017,98.704 C37.2@97.017,98.679
pads on no net: J1. J1.A2 J1.A3 J1.A6 J1.A7 J1.A8 J1.A10 J1.A11 J1.B2 J1.B3 J1.B6 J1.B7 J1.B8 J1.B10 J1.B11 J3.SH1 J3.SH2 MH1.2 MH2.2 MH3.2 MH4.2 U3.1 U3.17 U3.22 U3.25 U3.26 U3.27 U3.28 U3.30 U3.31 U3.42

## Polygon pours and split planes (outlines as drawn)
SRP on Layer 2 "SRP_L03_P017" (solid, pour order 17): 93.853,102.997 ccw(c92.71,102.997) 92.71,104.14 91.313,104.14 ccw(c91.313,102.87) 90.043,102.87 90.043,97.028 ccw(c91.186,97.028) 91.186,95.885 92.837,95.885 ccw(c92.837,96.901) 93.853,96.901
CELL_2S on Layer 2 "CELL_2S_L03_P002" (solid, pour order 2): 54.61,95.885 70.739,95.885 70.866,96.012 72.898,93.98 72.898,33.02 57.658,33.02 54.737,35.941 54.737,95.758
GND on Layer 1 "GND_L02_P020" (solid, remove dead copper, pour order 20): 54.991,116.078 cw(c57.531,116.078) 57.531,118.618 120.269,118.618 cw(c120.269,116.078) 122.809,116.078 122.809,102.87 ccw(c125.349,102.87) 125.349,100.33 125.857,100.33 cw(c125.857,98.171) 128.016,98.171 128.016,53.848 cw(c125.476,53.848) 125.476,51.308 115.951,51.308 ccw(c115.951,48.768) 113.411,48.768 113.411,37.338 cw(c110.998,37.338) 110.998,34.925 57.531,34.925 cw(c57.531,37.465) 54.991,37.465 54.991,85.852
NetC2_1 on Layer 1 "NETC2_1_L02_P016" (solid, remove dead copper, pour order 16): 78.359,106.299 cw(c80.01,106.299) 80.01,107.95 91.313,107.95 ccw(c91.313,109.22) 92.583,109.22 cw(c94.488,109.22) 94.488,111.125 102.362,111.125 cw(c102.362,108.585) 104.902,108.585 104.902,99.949 cw(c103.886,99.949) 103.886,98.933 82.169,98.933 cw(c82.169,99.187) 81.915,99.187 79.756,99.187 cw(c79.756,100.584) 78.359,100.584
CELL_3S on Layer 1 "CELL_3S_L02_P005" (solid, pour order 5): 68.834,77.978 69.342,77.47 69.342,57.277 72.263,57.277 76.073,53.467 76.073,46.101 70.485,46.101 64.008,39.624 62.239,39.624 59.661,45.993 59.213,77.978
VBUS on Top Layer "VBUS_L01_P009" (solid, pour order 9): 84.455,95.123 90.932,95.123 90.932,91.059 91.059,90.932 104.648,90.932 105.41,91.694 107.315,91.694 107.95,91.059 107.95,86.995 113.538,86.995 115.951,84.582 117.856,84.582 117.856,84.201 122.809,79.248 121.031,77.47 114.681,77.47 114.681,80.391 112.141,82.931 102.743,82.931 102.743,84.455 101.854,85.344 84.455,85.344
BAT on Top Layer "BAT_L01_P014" (solid, remove dead copper, pour order 14): 64.516,116.459 cw(c67.056,116.459) 67.056,118.999 78.105,118.999 cw(c78.105,116.459) 80.645,116.459 80.645,109.601 ccw(c82.55,109.601) 82.55,107.696 cw(c82.55,106.172) 84.074,106.172 84.074,101.346 cw(c81.534,101.346) 81.534,98.806 67.056,98.806 cw(c67.056,101.346) 64.516,101.346
CELL_4S on Top Layer "CELL_4S_L01_P000" (solid, pour order 0): 76.708,56.134 59.563,56.134 59.563,33.401 76.708,33.401
SRN on Bottom Layer "SRN_L04_P018" (solid, remove dead copper, pour order 18): 95.25,99.314 ccw(c92.71,99.314) 92.71,101.854 81.153,101.854 ccw(c81.153,99.314) 78.613,99.314 78.613,97.917 ccw(c81.026,97.917) 81.026,95.504 93.218,95.504 ccw(c93.218,97.536) 95.25,97.536
CELL_1S on Bottom Layer "CELL_1S_L04_P004" (solid, pour order 4): 57.785,101.092 70.231,101.092 70.231,40.767 56.388,40.767 56.388,99.695

## Keep-outs
Keep-Out Layer:
  circle w0.006: c190.006,190.006 r0.003
  circle w0.006: c190.006,190.006 r0.003
  circle w0.006: c190.006,190.006 r0.003
  circle w0.006: c190.006,190.006 r0.003
  circle w0.006: c190.006,190.006 r0.003
  lines w0.254: 79.222,31.762 ccw(c82.721,31.722) 86.221,31.722 ; 86.221,121.673 ccw(c82.721,121.722) 86.221,121.722 ; 105.721,31.75 ccw(c109.221,31.722) 112.721,31.722 ; 112.721,121.675 ccw(c109.221,121.722) 112.721,121.722 ; 79.221,31.722 ccw(c82.721,31.722) 86.221,31.722 ; 79.221,31.722 ccw(c82.721,31.722) 86.221,31.722 ; 79.221,31.722 77.291,31.722 56.721,31.722 cw(c59.54,36.698) 53.821,36.698 53.821,116.732 cw(c59.566,116.732) 56.721,121.722 77.291,121.722 79.221,121.722 ; 79.221,121.722 cw(c82.721,121.722) 86.221,121.722 ; 79.221,121.722 cw(c82.721,121.722) 86.221,121.722 ; 86.221,121.722 105.721,121.722 ; 86.221,121.722 105.721,121.722 ; 105.721,121.722 cw(c109.221,121.722) 112.721,121.722 ; 105.721,121.722 cw(c109.221,121.722) 112.721,121.722 ; 112.721,31.722 cw(c109.221,31.722) 105.721,31.722 ccw(c109.221,31.722) 112.721,31.722 ; 112.721,31.722 124.565,31.722 ; 112.721,31.722 124.565,31.722 ; 112.721,121.722 124.565,121.722 ; 112.721,121.722 124.565,121.722 ; 124.565,31.722 ccw(c-58.279,76.722) 128.821,55.498 ; 124.565,31.722 ccw(c-58.279,76.722) 128.821,55.498 ; 124.565,121.722 cw(c-58.279,76.722) 128.821,97.947 ; 124.565,121.722 cw(c-58.279,76.722) 128.821,97.947 ; 128.821,55.498 128.821,97.947 ; 128.821,55.498 128.821,97.947 ; 86.233,31.75 105.791,31.75 86.233,31.75

## Silkscreen, mask and mechanical layers (free items; w line width, h text height)
Top Overlay:
  drawing of 143 lines, arcs and shapes, not listed
Bottom Overlay:
  text "3V3" at 92.864,35.714 h0.52 r270
  text "SWDIO" at 95.404,35.587 h0.52 r270
  text "SWCLK/BOOT" at 97.69,35.587 h0.52 r270
  text "GND" at 100.103,35.587 h0.52 r270
Mechanical 5:
  circle w0.254: c82.677,31.75 r1.5
  circle w0.254: c109.347,31.496 r1.5
  circle w0.254: c123.721,51.722 r1.5
  circle w0.254: c82.804,121.666 r1.5
  circle w0.254: c109.347,121.666 r1.5
  circle w0.254: c123.721,101.722 r1.5